# Altium PCB Dash.PcbDoc (part 2 of 2)
Units mm, origin at the board's own origin, x right, y up, seen from the top; angles counter-clockwise.
Board outline 82.55 x 101.6 mm, 2 copper layers (Top Layer, Bottom Layer); 87 components, 65 nets, 296 pads, 122 vias.
Unrouted connection lines stored in the file: 3.
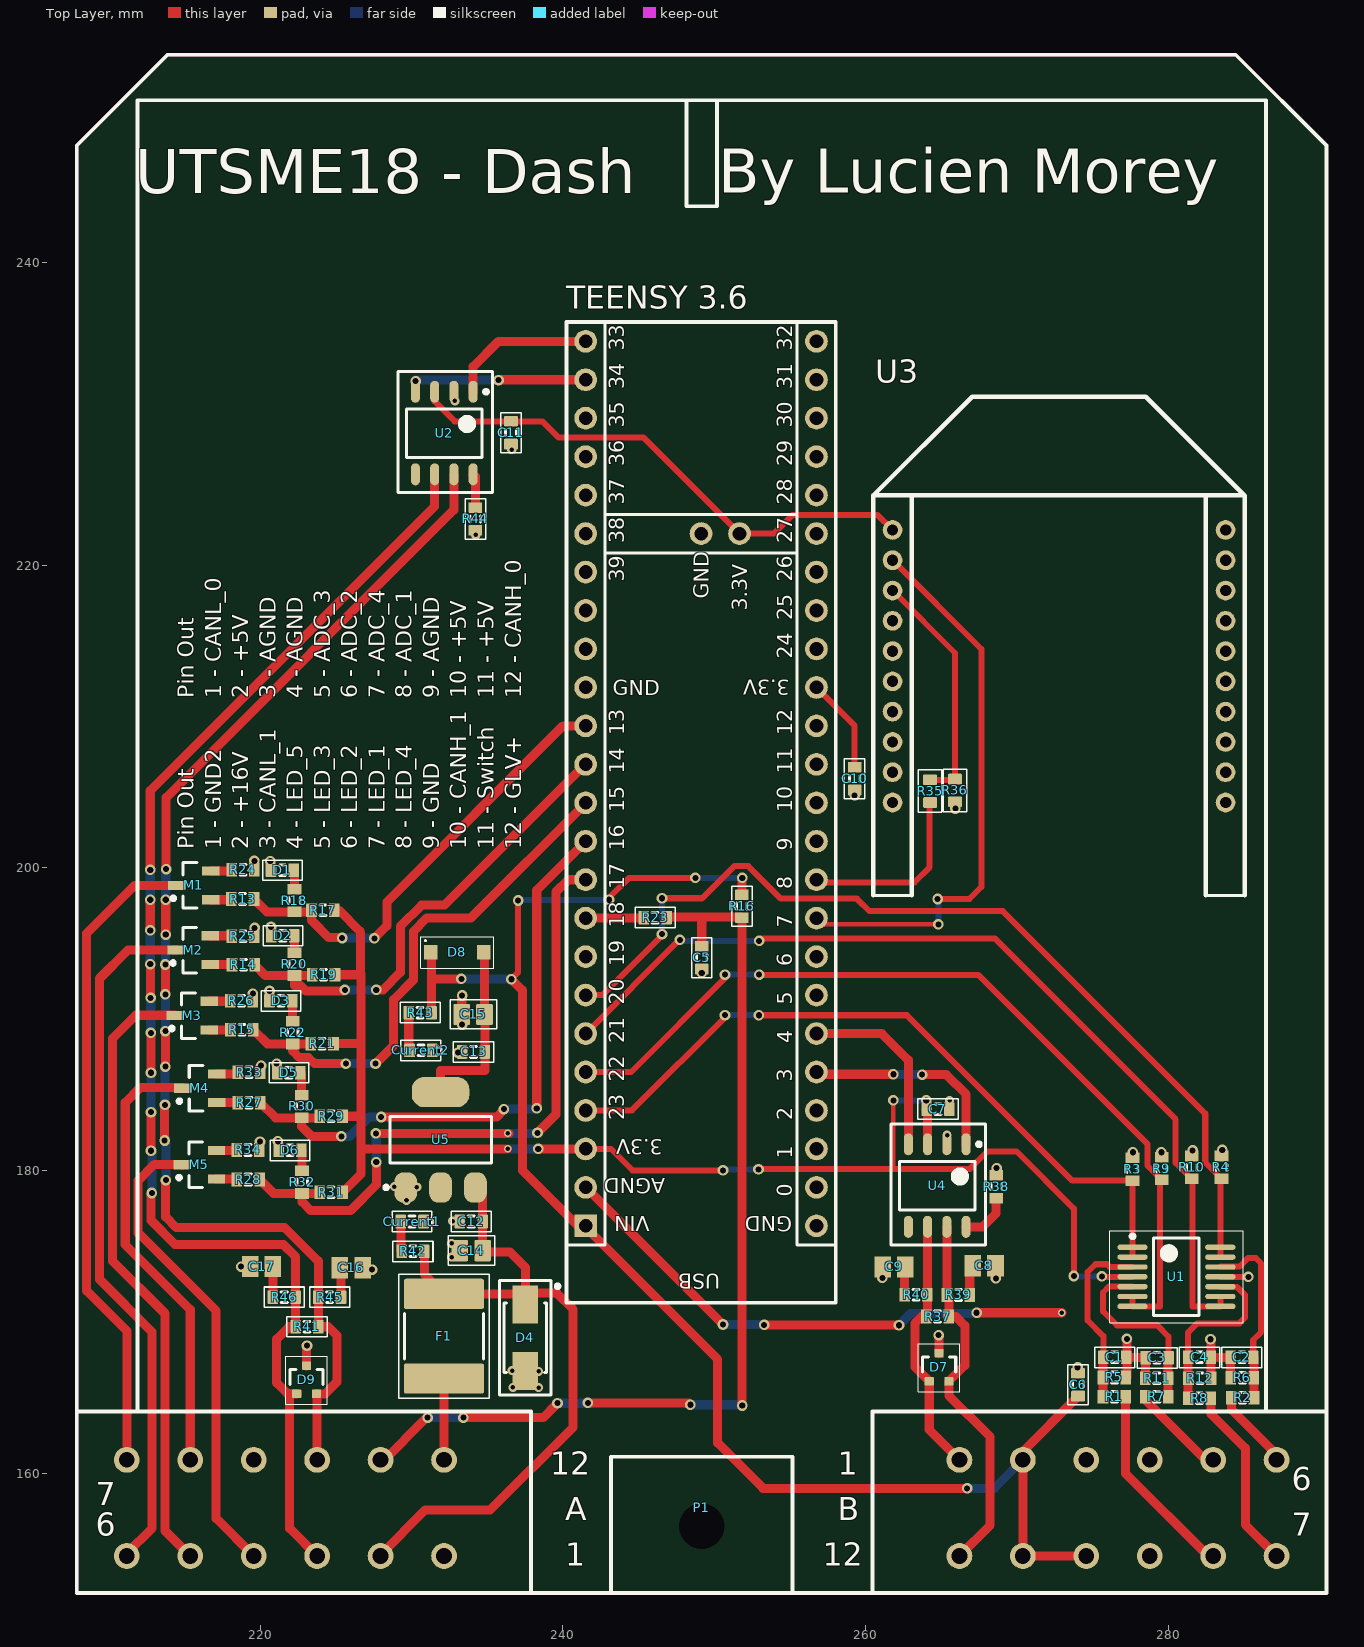
[diagram p0: Top Layer view]

## Via types
v1: diameter 0.7, hole 0.4, Top Layer to Bottom Layer, 103 vias
v2: diameter 0.6, hole 0.3, Top Layer to Bottom Layer, 16 vias
v3: diameter 0.5, hole 0.3, Top Layer to Bottom Layer, 3 vias

## Nets (pads, with @x,y where several pads share a name; then routed paths per layer and width w, separated by ;. In a path a pad name is that pad's centre, name@x,y a point inside that pad or via, vN(x,y) a via of type N, cw(c..) or ccw(c..) an arc to the next point about the centre after c; other vN are vias at no path point) (continued)
CANH_1: (continued)
  Top Layer w0.6: v1(213.7,182) 213.704,182.004 213.704,184.249 213.7,184.253 213.7,184.325 v1(213.725,184.35) ; v1@213.725,179.35 213.764,179.311 213.764,176.961 214.475,176.25 221.627,176.25 223.85,174.027 R45.1 R41.1 224.5,169.7 225.075,169.125 225.075,166.05 224.275,165.25 D9.2@223.75,165.25 ; v1(213.75,186.875) v1(213.75,189.225) ; v1(213.75,191.65) v1(213.75,193.625) ; v1(213.775,195.6) v1(213.775,197.9) ; v1(213.8,199.925) 213.8,204.65 232.805,223.655 U2.7 ; D9.2 223.725,165.25 D9.2@223.75,165.25 ; P1.10 223.772,165.228 D9.2@223.75,165.25
  Bottom Layer w0.6: v1@213.725,181.85 213.785,181.79 v1(213.785,179.384) ; v1(213.725,184.35) v1@213.725,186.675 ; v1(213.75,189.225) v1@213.75,191.6 ; v1(213.75,193.625) v1@213.75,195.475 ; v1(213.775,197.9) v1@213.775,199.825
CANL_0: D7.1 P1.13 R37.2 R40.2 U4.6 | length 17.1
  Top Layer w0.6: U4.6 264.09,171.84 R40.2 264.075,170.45 R37.2 263.7,170.375 263.25,169.925 263.25,167.05 D7.1 264.2,162.901 P1.13
CANL_1: D9.1 P1.3 R41.2 R46.2 U2.6 | length 89.4
  Top Layer w0.6: v1(212.75,195.875) v1(212.75,197.9) ; v1(212.75,199.875) 212.75,205.1 231.535,223.885 U2.6 ; v1(212.775,191.425) v1@212.775,193.65 ; v1(212.785,189.109) 212.8,189.095 v1(212.8,186.475) ; v1(212.8,181.325) 212.796,181.329 212.796,183.871 v1(212.8,183.875) ; v1@212.85,178.5 212.8,178.45 212.8,176.723 214.398,175.125 221.55,175.125 222.35,174.325 R46.2 R41.2 221.925,169.7 221.1,168.875 221.1,166 221.825,165.275 ; D9.1 221.825,165.275 ; P1.3 221.95,156.381 221.95,165.2 221.9,165.2 221.825,165.275
  Bottom Layer w0.6: v1(212.75,193.65) v1@212.75,195.85 ; v1(212.75,197.9) v1@212.75,199.825 ; v1(212.785,189.109) v1@212.785,191.34 ; v1(212.8,183.875) v1@212.8,186.225 ; v1(212.86,178.534) v1@212.86,181.3
GND: "TEENSY 3.6.GND" C5.2 C7.1 C8.1 C9.1 C10.2 C11.1 C12.1 C13.1 C14.2 C15.2 C16.1 C17.1 Current1.2 Current2.2 D1.2 D2.2 D3.2 D4.2 D5.2 D6.2 D7.3 D9.3 P1.1 P1.9 R24.2 R25.2 R26.2 R33.2 R34.2 R36.1 R38.1 R44.1 U2.2 U3.10 U4.2 U5.1 | length 4.5
  Top Layer w0.6: C17.1 C17.1@219.582,173.675 ; v1(220.075,186.95) v1@220.075,186.975 ; D9.3 223.075,168.45 v1(223.1,168.45) ; C16.1 C16.1@226.8,173.6 ; Current2.2@231.375,187.85 Current2.2 ; C15.2 v1@233.325,191.375 ; D4.2 D4.2@237.775,166.775 ; D7.3 v1@264.85,168.9 ; R38.1 v1@268.625,180.175
  Bottom Layer w0.6: v1@223.1,168.425 v1(223.1,168.45) ; v1(264.825,169.15) v1@264.825,169.175
  other v1: 268.6,172.9 261.1,172.925 227.4,173.475 218.75,173.675 268.65,180.175 220,181.925 221.175,181.95 221.1,187.075 233.075,187.8 231.725,187.925 233.35,189.65 233.35,191.575 219.525,191.7 220.625,191.875 249.175,193.075 219.65,196.05 220.725,196.1 220.675,200.45 219.625,200.475 265.925,203.925 259.275,204.8
  other v2: 238.4,165.675 236.7,165.7 238.4,166.75 236.65,166.8 232.65,174.3 232.65,175.2 231.225,176.6 232.725,176.675 229.675,178.05 230.35,178.925 228.875,178.95 265.375,182.35 265.55,184.65 234.25,222 236.627,227.627 232.873,230.852
LED_1: "TEENSY 3.6.13" R13.1 R17.1 R18.2 | length 30.1
  Top Layer w0.6: R13.1 220.45,197.1 R18.2 223.3,197.1 R17.1 223.4,196.55 224.55,195.4 v1@225.425,195.4 ; v1(227.55,195.35) 228.375,196.175 228.375,197.75 240.01,209.385 241.51,209.385
  Bottom Layer w0.6: v1(225.425,195.375) v1@227.5,195.375
LED_1_IN: M1.1 P1.7 | length 43.1
  Top Layer w0.6: P1.7 211.202,169.423 208.55,172.075 208.55,195.675 211.725,198.85 M1.1
LED_2: "TEENSY 3.6.14" R14.1 R19.1 R20.2 | length 32.4
  Top Layer w0.6: R14.1 220.35,192.9 R20.2 ; R19.1 223.4,192.9 R20.2 ; v1@225.549,191.874 223.029,191.874 222.674,192.229 222.275,192.229 R20.2 ; v1(227.675,191.95) 228.125,191.95 229.275,193.1 229.275,196.152 230.673,197.55 232.175,197.55 241.47,206.845 241.51,206.845 241.51,207.175
  Bottom Layer w0.6: v1(225.6,191.95) v1@227.625,191.95
LED_2_IN: M2.1 P1.6 | length 45.8
  Top Layer w0.6: P1.6 211.202,154.727 212.875,156.4 212.875,169.35 209.4,172.825 209.4,192.7 211.275,194.575 M2.1@213.95,194.575 ; M2.1@214.275,194.575 M2.1
LED_3: "TEENSY 3.6.15" R15.1 R21.1 R22.2 | length 35
  Top Layer w0.6: R15.1 220.5,188.375 R22.2 ; R21.1 223.325,188.375 R22.2 ; v1(225.675,187.075) 223.603,187.075 223.199,187.479 222.6,187.479 222.15,187.929 R22.2 ; v1(227.625,187.075) 228.825,188.275 228.825,191.3 230.125,192.6 230.125,195.8 231.025,196.7 233.935,196.7 241.51,204.275 241.51,204.305
  Bottom Layer w0.6: v1(225.675,187.075) v1@227.5,187.1
LED_3_IN: M3.1 P1.5 | length 41.1
  Top Layer w0.6: M3.1 214.375,190.275 211.8,190.275 210.25,188.725 210.25,174.05 213.725,170.575 213.725,156.226 P1.5
LED_4: "TEENSY 3.6.16" R27.1 R29.1 R30.2 | length 40.5
  Top Layer w0.6: R27.1 221.025,183.5 R30.2 ; R29.1 223.85,183.5 R30.2 ; v1(225.375,182.275) 223.4,182.275 222.75,182.925 R30.2 ; v1(228,183.55) 235.625,183.55 v1@236.1,184.025 ; v1(238.275,184.125) 238.275,198.53 241.51,201.765
  Bottom Layer w0.6: v1(225.375,182.275) 225.925,182.275 227.2,183.55 v1(228,183.55) ; v1(236.1,184.075) 238.225,184.075 v1(238.275,184.125)
LED_4_IN: M4.1 P1.8 | length 29.6
  Top Layer w0.6: M4.1@214.9,185.5 212.1,185.5 211.1,184.5 211.1,175.125 215.392,170.833 P1.8
LED_5: "TEENSY 3.6.17" R28.1 R31.1 R32.2 | length 43.6
  Top Layer w0.6: R28.1 220.9,178.5 R32.2 ; R31.1 223.875,178.5 R32.2 ; v1(227.65,182.475) v3(236.375,182.475) v3@236.45,182.475 ; v1@227.7,180.575 227.7,179.1 225.975,177.375 223.35,177.375 222.775,177.95 R32.2 ; v1(238.325,182.5) 239.55,183.725 239.55,198.425 240.35,199.225 241.51,199.225
  Bottom Layer w0.6: v1(227.675,180.575) v1@227.675,182.4 ; v3(236.375,182.475) v1@238.325,182.475
LED_5_IN: M5.1 P1.4 | length 31.3
  Top Layer w0.6: M5.1 214.854,180.421 213.021,180.421 211.95,179.35 211.95,175.9 217.1,170.75 217.1,157.041 P1.4
NetC1_1: C1.1 R1.2 R5.1 U1.3 | length 12
  Top Layer w0.4: C1.1 275.7,169.075 274.65,170.125 274.65,173.3 275.179,173.829 275.933,173.829 276.112,173.65 U1.3
  Top Layer w0.6: R1.2 275.675,167.675 C1.1
NetC2_1: C2.1 R2.2 R6.1 U1.12 | length 12.2
  Top Layer w0.4: U1.12@283.446,173.671 284.689,173.671 285.268,174.25 285.78,174.25 285.78,174.224 286.125,173.879 286.125,169.35 285.6,168.825 C2.1
  Top Layer w0.6: C2.1 285.65,167.675 R2.2
NetC3_1: C3.1 R7.2 R11.1 U1.5 | length 12.4
  Top Layer w0.4: U1.5 276.062,172.35 275.675,171.963 275.675,170.725 276.6,169.8 279.25,169.8 280,169.05 C3.1
  Top Layer w0.6: R7.2 279.975,167.65 C3.1
NetC4_1: C4.1 R8.2 R12.1 U1.10 | length 11.8
  Top Layer w0.4: C4.1 281.3,169.325 281.9,169.925 284.675,169.925 285.05,170.3 285.05,171.8 284.521,172.329 U1.10@283.425,172.329
  Top Layer w0.6: R8.2 C4.1
NetC8_2: C8.2 R39.2 | length 2
  Top Layer w0.6: R39.2 266.875,173.525 C8.2
NetC9_2: C9.2 R40.1 | length 1.8
  Top Layer w0.6: R40.1 262.575,173.6 C9.2
NetC13_2: C13.2 C15.1 D8.2 U5.2 | length 12.2
  Top Layer w0.6: U5.2@231.925,185.2 231.925,186.625 234.85,186.625 C13.2 234.85,190.325 C15.1 234.825,194.425 D8.2
NetC16_2: C16.2 R45.2 | length 2
  Top Layer w0.6: C16.2 225.35,173.6 R45.2
NetC17_2: C17.2 R46.1 | length 2
  Top Layer w0.6: R46.1 C17.2
NetCurrent1_1: Current1.1 R42.2 | length 2
  Top Layer w0.6: Current1.1 229.3,174.725 R42.2
NetCurrent2_1: Current2.1 R43.2 | length 2.5
  Top Layer w0.6: R43.2 229.825,187.95 Current2.1
NetD1_1: D1.1 R18.1 | length 1.3
  Top Layer w0.6: D1.1 222.275,199.8 R18.1
NetD2_1: D2.1 R20.1 | length 1.1
  Top Layer w0.6: D2.1 222.275,195.5 R20.1
NetD3_1: D3.1 R22.1 | length 1.4
  Top Layer w0.6: D3.1 222.15,191.2 R22.1
NetD5_1: D5.1 R30.1 | length 1.5
  Top Layer w0.6: D5.1 222.75,186.375 R30.1
NetD6_1: D6.1 R32.1 | length 1.4
  Top Layer w0.6: D6.1 222.775,181.3 R32.1
NetF1_2: F1.2 P1.12 | length 5.4
  Top Layer w0.6: F1.2 232.152,166.273 P1.12
NetM1_2: M1.2 R24.1 | length 1.4
  Top Layer w0.6: M1.2 218.05,199.8 R24.1
NetM1_3: M1.3 R13.2 | length 1.4
  Top Layer w0.6: M1.3 218.05,197.9 R13.2
NetM2_2: M2.2 R25.1 | length 1.5
  Top Layer w0.6: M2.2 218.1,195.525 R25.1 R25.1@218.125,195.6
NetM2_3: M2.3 R14.2 | length 1.4
  Top Layer w0.6: M2.3 218.125,193.625 R14.2
NetM3_2: M3.2 R26.1 | length 1.4
  Top Layer w0.6: M3.2 218,191.2 R26.1
NetM3_3: M3.3 R15.2 | length 1.4
  Top Layer w0.6: M3.3 218.025,189.3 R15.2
NetM4_2: M4.2 R33.1 | length 1.4
  Top Layer w0.6: M4.2 218.425,186.4 R33.1
NetM4_3: M4.3 R27.2 | length 1.4
  Top Layer w0.6: M4.3 R27.2
NetM5_2: M5.2 R34.1 | length 1.3
  Top Layer w0.6: M5.2 218.425,181.35 R34.1
NetM5_3: M5.3 R28.2 | length 1.4
  Top Layer w0.6: M5.3 218.45,179.45 R28.2
NetR23_1: "TEENSY 3.6.18" R23.1 | length 3.9
  Top Layer w0.6: 241.51,196.685 245.35,196.685 R23.1
NetR35_1: R35.1 R36.2 U3.3 | length 15.8
  Top Layer w0.4: U3.3 265.9,214.2 R36.2 265.85,205.825 R35.1
NetR38_2: R38.2 U4.8 | length 3.4
  Top Layer w0.6: U4.8 267.725,176.3 268.6,177.175 268.6,178.2 R38.2
NetR44_2: R44.2 U2.8 | length 2.3
  Top Layer w0.6: U2.8 234.225,225.85 R44.2
Power_Switch: C5.1 P1.11 R16.2 R23.2 | length 65
  Top Layer w0.6: P1.11 227.962,160.662 231.075,163.775 v1(231.075,163.7) ; v1(233.425,163.7) 238.7,163.7 v1@239.55,164.55 ; v1(241.65,164.675) 248.325,164.675 v1@248.425,164.575 ; R23.2 246.85,196.775 251.775,196.775 R16.2 251.825,164.5 v1@251.825,164.45 ; C5.1 249.175,196.725
  Bottom Layer w0.6: v1(231.075,163.7) v1(233.425,163.7) ; v1(239.65,164.65) 241.625,164.65 v1(241.65,164.675) ; v1(248.425,164.55) 251.8,164.55 v1(251.85,164.5)
UART_RX: "TEENSY 3.6.7" U3.2 | length 37.2
  Top Layer w0.3: 256.75,196.685 257.16,196.275 v1(264.8,196.275)
  Top Layer w0.4: U3.2 267.65,214.45 267.65,198.75 266.85,197.95 v1(264.75,197.95)
  Bottom Layer w0.4: v1@264.725,197.95 264.8,197.875 v1(264.8,196.275)
UART_TX: "TEENSY 3.6.8" R35.2 | length 12.1
  Top Layer w0.4: 256.75,199.05 263.225,199.05 264.225,200.05 R35.2@264.225,204.275
pads on no net: "TEENSY 3.6.0" "TEENSY 3.6.1" "TEENSY 3.6.2" "TEENSY 3.6.5" "TEENSY 3.6.6" "TEENSY 3.6.9" "TEENSY 3.6.10" "TEENSY 3.6.11" "TEENSY 3.6.12" "TEENSY 3.6.19" "TEENSY 3.6.24" "TEENSY 3.6.25" "TEENSY 3.6.26" "TEENSY 3.6.27" "TEENSY 3.6.28" "TEENSY 3.6.29" "TEENSY 3.6.30" "TEENSY 3.6.31" "TEENSY 3.6.32" "TEENSY 3.6.35" "TEENSY 3.6.36" "TEENSY 3.6.37" "TEENSY 3.6.38" "TEENSY 3.6.39" "TEENSY 3.6.A21" "TEENSY 3.6.A22" P1. U2.5 U3.4 U3.5 U3.6 U3.7 U3.8 U3.9 U3.11 U3.12 U3.13 U3.14 U3.15 U3.16 U3.17 U3.18 U3.19 U3.20 U4.5

## Polygon pours and split planes (outlines as drawn)
GND on Bottom Layer "Bottom Layer-GND" (solid, pour order 14): 208.675,152.575 289.5,152.5 289.5,217 258.02,217 258.02,236.5 208.675,236.5
no net on Bottom Layer "Bottom Layer-No Net" (solid, pour order 12): 208.675,152.575
AGND on Bottom Layer "Bottom Layer-AGND" (solid, pour order 8): 272.275,152.585 272.275,185.275 290,185.275 290,152.422

## Keep-outs
Keep-Out Layer:
  the board outline again, w0.2

## Silkscreen, mask and mechanical layers (free items; w line width, h text height)
Top Overlay:
  text "By Lucien Morey" at 250.25,243.625 h5
  text "UTSME18 - Dash" at 211.775,243.6 h5
  text "Pin Out / 1 - CANL_0 / 2 - +5V / 3 - AGND / 4 - AGND / 5 - ADC_3 / 6 - ADC_2 / 7 - ADC_4 / 8 - ADC_1 / 9 - AGND  / 10 - +5V / 11 - +5V  / 12 - CANH_0" at 237.6,211.225 h1.8 r90
  text "Pin Out / 1 - GND2 / 2 - +16V / 3 - CANL_1 / 4 - LED_5 / 5 - LED_3 / 6 - LED_2 / 7 - LED_1 / 8 - LED_4 / 9 - GND  / 10 - CANH_1  / 11 - Switch / 12 - GLV+" at 237.6,201.25 h1.8 r90

## Text inside footprints (layer, text, board x,y; h text height)
P1: Top Overlay "12" at 239.152,159.909 h1.52; Top Overlay "1" at 240.172,153.909 h1.52; Top Overlay "12" at 257.152,153.909 h1.52; Top Overlay "1" at 258.172,159.909 h1.52; Top Overlay "B" at 258.172,156.909 h1.52; Top Overlay "A" at 240.172,156.909 h1.52; Top Overlay "6" at 288.152,158.909 h1.52; Top Overlay "7" at 288.152,155.909 h1.52; Top Overlay "6" at 209.152,155.909 h1.52; Top Overlay "7" at 209.152,157.909 h1.52
"TEENSY 3.6": Top Overlay "3.3V" at 254.972,212.433 h1 r180; Top Overlay "GND" at 243.288,211.417 h1; Top Overlay "33" at 244.05,234.15 h1 r90; Top Overlay "34" at 244.05,231.61 h1 r90; Top Overlay "35" at 244.05,229.07 h1 r90; Top Overlay "36" at 244.05,226.53 h1 r90; Top Overlay "37" at 244.05,223.99 h1 r90; Top Overlay "38" at 244.05,221.45 h1 r90; Top Overlay "39" at 244.05,218.91 h1 r90; Top Overlay "13" at 244.05,208.75 h1 r90; Top Overlay "32" at 255.15,234.15 h1 r90; Top Overlay "31" at 255.15,231.61 h1 r90; Top Overlay "30" at 255.15,229.07 h1 r90; Top Overlay "29" at 255.15,226.53 h1 r90; Top Overlay "28" at 255.15,223.99 h1 r90; Top Overlay "27" at 255.15,221.45 h1 r90; Top Overlay "26" at 255.15,218.91 h1 r90; Top Overlay "25" at 255.15,216.37 h1 r90; Top Overlay "24" at 255.15,213.83 h1 r90; Top Overlay "12" at 255.15,208.75 h1 r90; Top Overlay "23" at 244.05,183.35 h1 r90; Top Overlay "22" at 244.05,185.89 h1 r90; Top Overlay "21" at 244.05,188.43 h1 r90; Top Overlay "GND" at 255.15,177 h1 r180; Top Overlay "AGND" at 246.75,179.52 h1 r180; Top Overlay "20" at 244.05,190.97 h1 r90; Top Overlay "19" at 244.05,193.51 h1 r90; Top Overlay "18" at 244.05,196.05 h1 r90; Top Overlay "17" at 244.05,198.59 h1 r90; Top Overlay "16" at 244.05,201.13 h1 r90; Top Overlay "15" at 244.05,203.67 h1 r90; Top Overlay "3.3V" at 252.178,217.005 h1 r90; Top Overlay "GND" at 249.638,217.767 h1 r90; Top Overlay "14" at 244.05,206.21 h1 r90; Top Overlay "0" at 255.15,178.27 h1 r90; Top Overlay "VIN" at 245.75,177 h1 r180; Top Overlay "3.3V" at 246.59,182.08 h1 r180; Top Overlay "2" at 255.15,183.35 h1 r90; Top Overlay "3" at 255.15,185.89 h1 r90; Top Overlay "4" at 255.15,188.43 h1 r90; Top Overlay "5" at 255.15,190.97 h1 r90; Top Overlay "6" at 255.15,193.51 h1 r90; Top Overlay "7" at 255.15,196.05 h1 r90; Top Overlay "8" at 255.15,198.59 h1 r90; Top Overlay "9" at 255.15,201.13 h1 r90; Top Overlay "10" at 255.15,203.67 h1 r90; Top Overlay "11" at 255.15,206.21 h1 r90; Top Overlay "1" at 255.15,180.81 h1 r90; Top Overlay "USB" at 250.4,173.19 h1 r180